# Altium PCB DAC_Board.PcbDoc
Units mm, origin at the board's own origin, x right, y up, seen from the top; angles counter-clockwise.
Board outline 60 x 60 mm, 2 copper layers (Top Layer, Bottom Layer); 69 components, 59 nets, 199 pads, 95 vias.
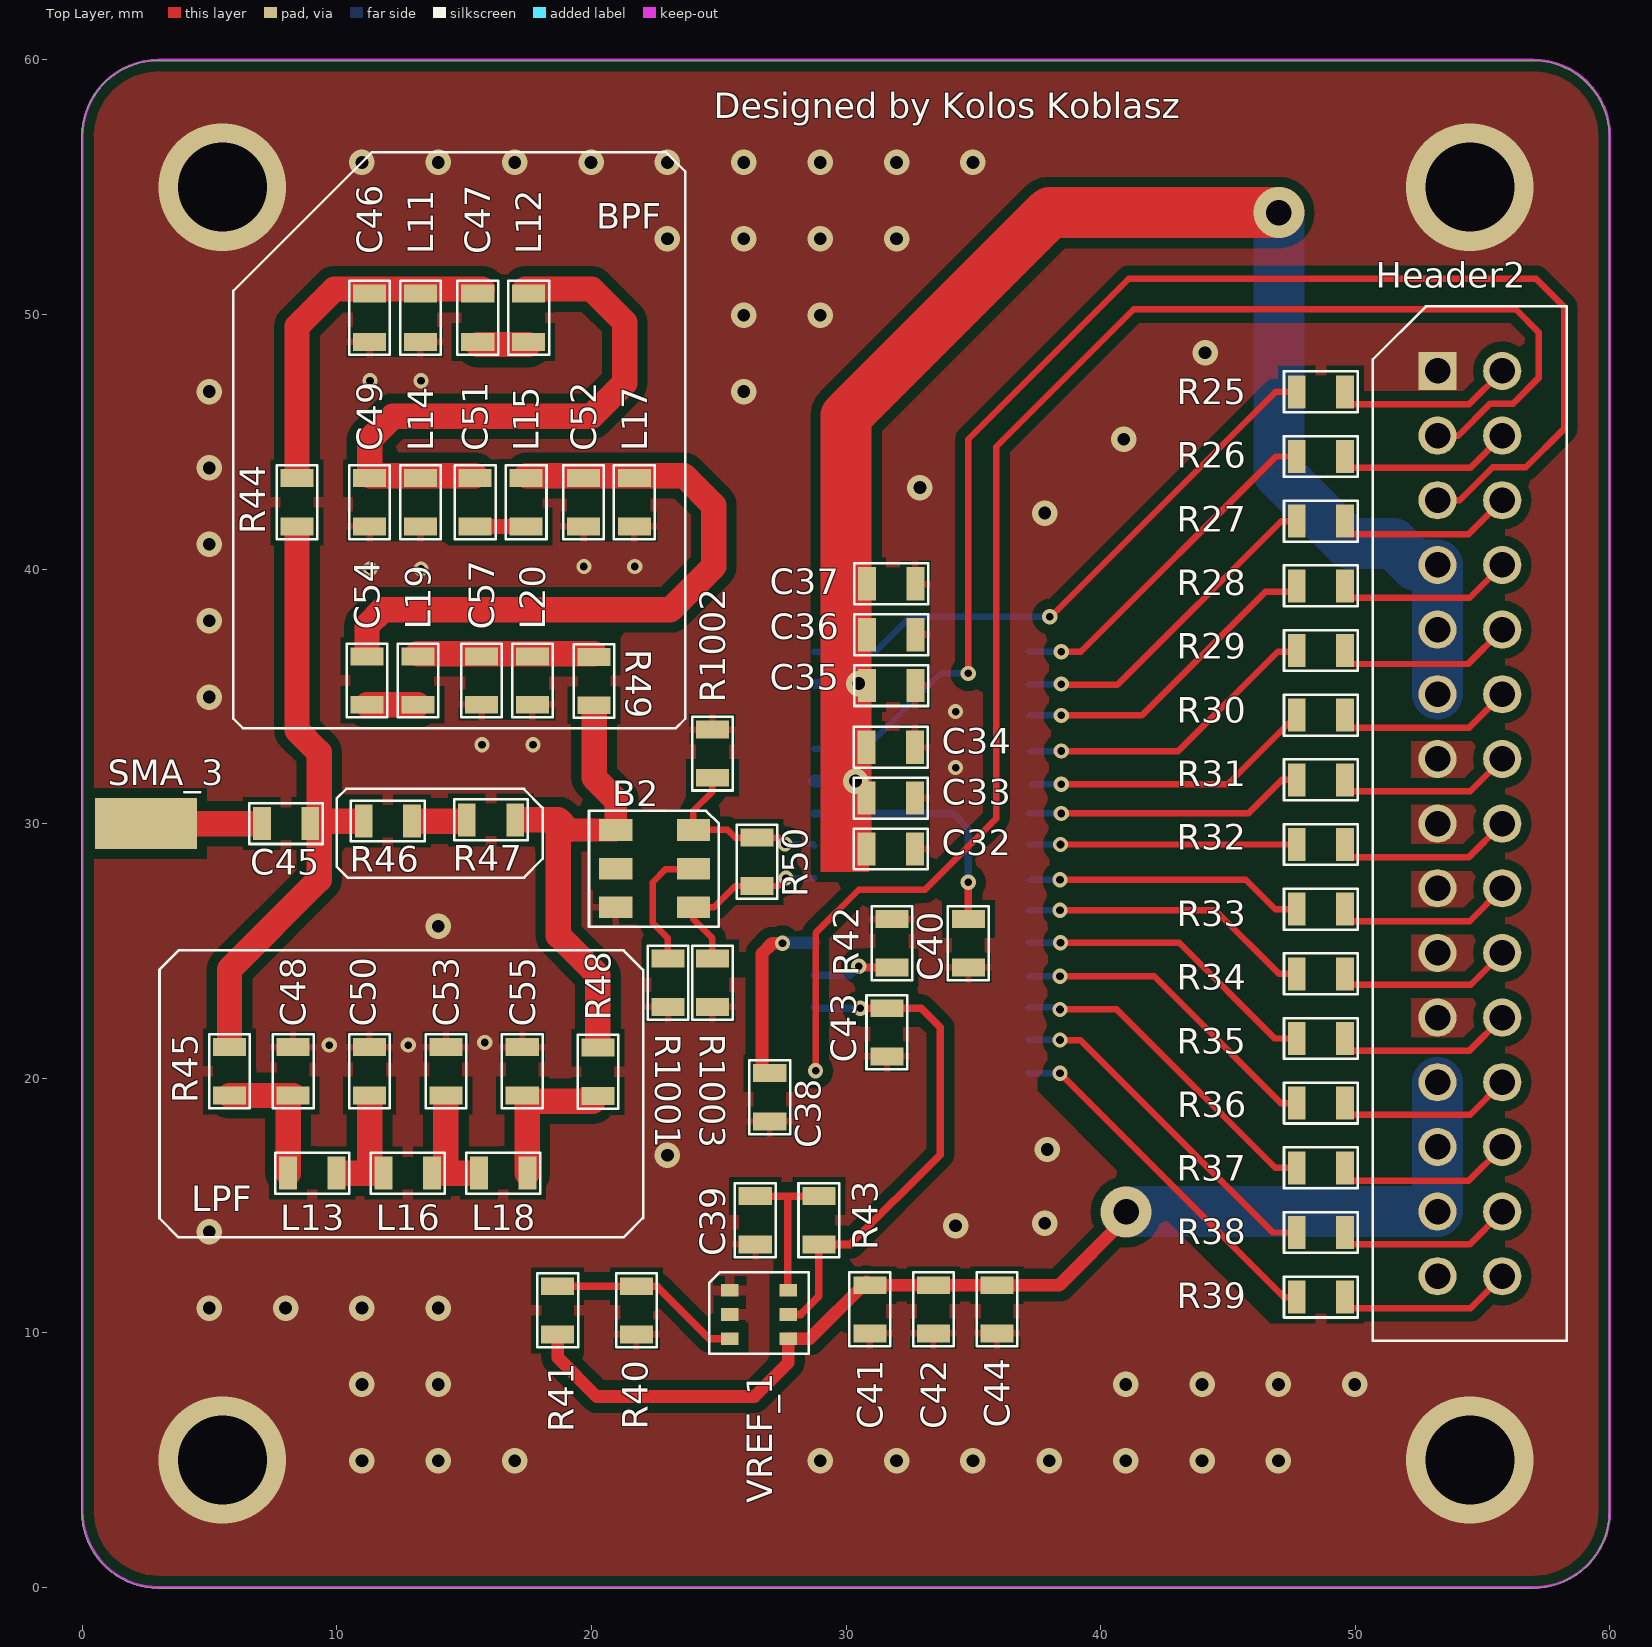
[diagram p0: Top Layer view]
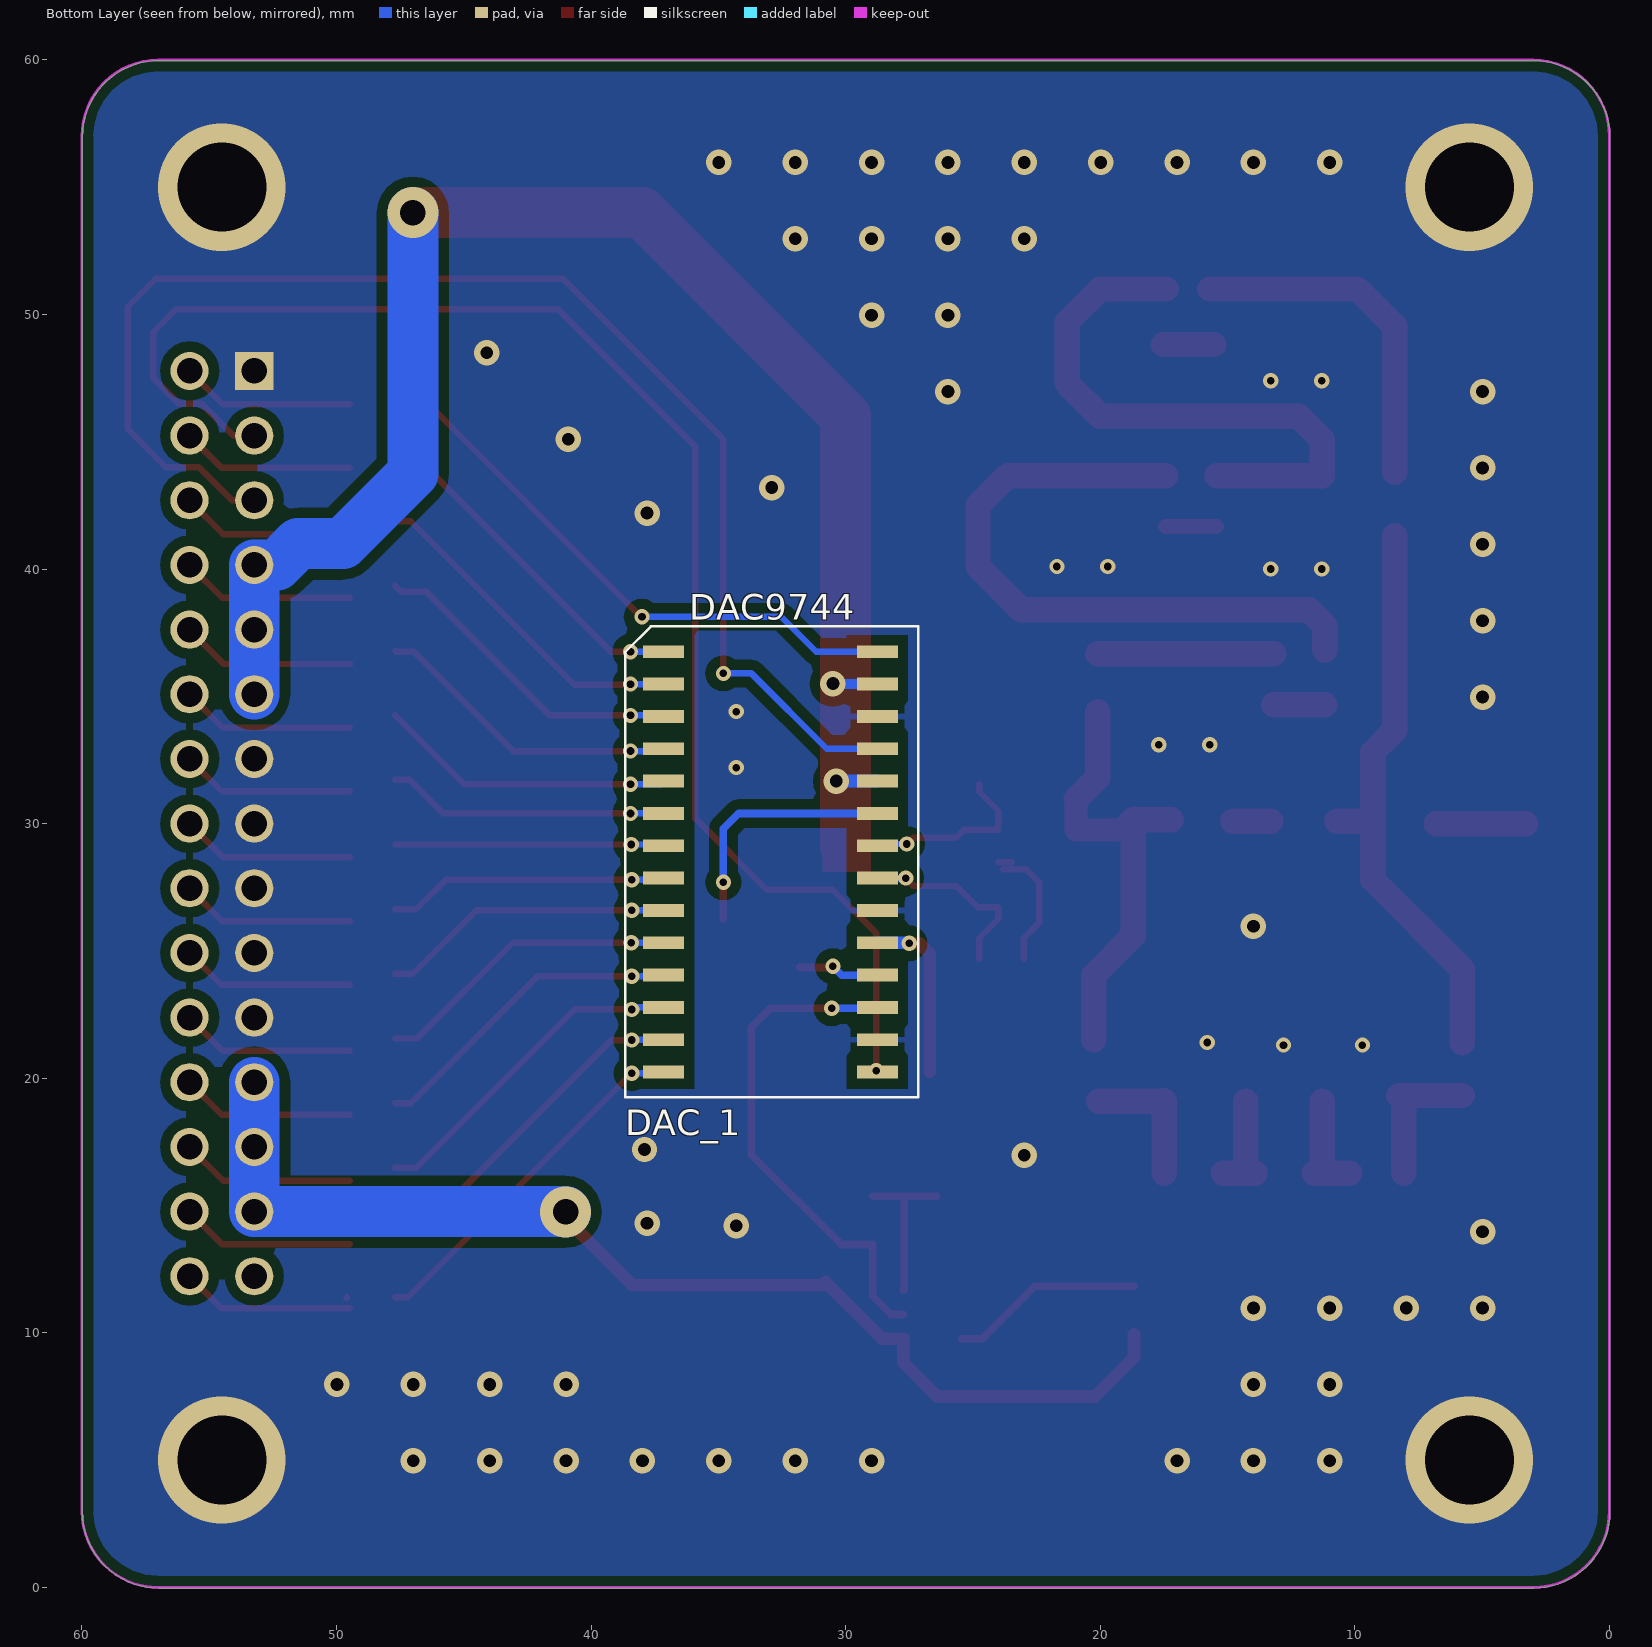
[diagram p1: Bottom Layer view, seen from below]

## Layer stack, top to bottom
Top Solder: solder mask 0.0102, Solder Resist, Dk 3.5
Top Layer: signal copper 0.0356
Dielectric 1: dielectric 0.32, FR-4, Dk 4.8
Bottom Layer: signal copper 0.0356
Bottom Solder: solder mask 0.0102, Solder Resist, Dk 3.5

## Board outline
2.98,-0.03 cw(c2.98,2.97) -0.02,2.97 -0.02,56.97 cw(c2.98,56.97) 2.98,59.97 56.98,59.97 cw(c56.98,56.97) 59.98,56.97 59.98,2.97 cw(c56.98,2.97) 56.98,-0.03

## Design rules (kind name [scope] priority, off if disabled: settings)
Clearance "Stitching GND" [IsStitchingVia and InNet('GND') vs (IsVia and (Not IsStitchingVia)) Or IsPad  Or IsTrack] p1: gap=2
Clearance Clearance_1 [All vs OnLayer('Keep-Out Layer')] p2: gap=0.4
Clearance [All] p3: gap=0.18 except(0.4: Track-Poly SMDPad-Poly THPad-Poly Via-Poly Fill-Poly)
HoleSize [All] p1: absolutevalues=TRUE maxlimit=6.7 minlimit=0.3 maxpercent=80.000 minpercent=20.000
Length [All] p1: maxlimit=2540 minlimit=0
MatchedLengths MatchedLengths_ADC [InNetClass('ADC_DataBus')] p1: tolerance=1 checknetsindiffpair=TRUE checkdiffpairvsdiffpair=FALSE checkxsignals=FALSE checkothers=FALSE
MatchedLengths MatchedLengths_DAC [InNetClass('DAC_DataBus')] p2: tolerance=1 checknetsindiffpair=TRUE checkdiffpairvsdiffpair=FALSE checkxsignals=FALSE checkothers=FALSE
MinimumAnnularRing [All] p1: minimumring=0.076
MinimumSolderMaskSliver [All] p1: minsoldermaskwidth=0
ParallelSegment [All] p1: limit=254 gap=0.254
PolygonConnect PolygonConnect_4 [HasFootprint('Balun_Coil_Craft_WBC')] p1: connectstyle=Relief reliefconductorwidth=0.254 reliefentries=4 polygonreliefangle="90 Angle" airgapwidth=0.254
PolygonConnect PolygonConnect_2 [HasFootprint('AD9744')] p2: connectstyle=Relief reliefconductorwidth=0.254 reliefentries=4 polygonreliefangle="90 Angle" airgapwidth=0.254
PolygonConnect [HasFootprint('0805 SMD Passive')] p3: connectstyle=Relief reliefconductorwidth=0.254 reliefentries=4 polygonreliefangle="90 Angle" airgapwidth=0.254
PolygonConnect PolygonConnect_1 [HasFootprint('ADR3412')] p4: connectstyle=Relief reliefconductorwidth=0.4 reliefentries=4 polygonreliefangle="90 Angle" airgapwidth=0.3
PolygonConnect PolygonConnect_3 [All] p5: connectstyle=Direct reliefconductorwidth=0.254 reliefentries=4 polygonreliefangle="90 Angle" airgapwidth=0.254
RoutingTopology [All] p1: topology=Starburst
RoutingVias [All] p1: holewidth=0.5 width=1 viastyle="Through Hole" minholewidth=0.3 minwidth=0.45 maxholewidth=1 maxwidth=6
SilkToSilkClearance [All] p1: silktosilkclearance=0
SilkToSolderMaskClearance [IsPad] p1: minsilkscreentomaskgap=0 clearancetoexposedcopper=TRUE
SolderMaskExpansion [All] p1: expansion=0.102
Width [All] p1: maxlimit=5 minlimit=0.127 preferedwidth=0.254
25 further rules are at their usual default settings.

## Classes and differential pairs
net class DAC_DataBus: DAC_CLOCK DAC_DB0 DAC_DB1 DAC_DB2 DAC_DB3 DAC_DB4 DAC_DB5 DAC_DB6 DAC_DB7 DAC_DB8 DAC_DB9 DAC_DB10 DAC_DB11 DAC_DB12 DAC_DB13
component class DAC_Filter: B2 C45 C46 C47 C48 C49 C50 C51 C52 C53 C54 C55 C57 L11 L12 L13 L14 L15 L16 L17 L18 L19 L20 R44 R45 R46 R47 R48 R49 R50 R1001 R1002 R1003 SMA_3
component class DAC_board: C32 C33 C34 C35 C36 C37 C38 C39 C40 C41 C42 C43 C44 DAC_1 Header2 R25 R26 R27 R28 R29 R30 R31 R32 R33 R34 R35 R36 R37 R38 R39 R40 R41 R42 R43 VREF_1

## Components (designator, comment, footprint, x,y, rotation, side; value= is the part's Value field where it differs from the comment)
B2 "Balun" Balun_Coil_Craft_WBC 24,29.75 r270 top locked
C32 "Cap1" "0805 SMD Passive" 31.75,29 r0 top
C33 "Cap1" "0805 SMD Passive" 31.75,31 r0 top
C34 "Cap1" "0805 SMD Passive" 31.75,33 r0 top
C35 "Cap1" "0805 SMD Passive" 31.77,35.42 r0 top
C36 "Cap1" "0805 SMD Passive" 31.77,37.42 r0 top
C37 "Cap1" "0805 SMD Passive" 31.77,39.42 r0 top
C38 "Cap1" "0805 SMD Passive" 27,19.25 r270 top
C39 "Cap1" "0805 SMD Passive" 26.43,14.42 r270 top
C40 "Cap1" "0805 SMD Passive" 34.8,25.3 r270 top
C41 "Cap1" "0805 SMD Passive" 30.93,10.92 r270 top
C42 "Cap1" "0805 SMD Passive" 33.43,10.92 r270 top
C43 "Cap1" "0805 SMD Passive" 31.6,21.8 r270 top
C44 "Cap1" "0805 SMD Passive" 35.93,10.92 r270 top
C45 "Cap1" "0805 SMD Passive" 8,30 r180 top
C46 "Cap1" "0805 SMD Passive" 11.28,49.87 r270 top
C47 "Cap1" "0805 SMD Passive" 15.53,49.87 r270 top
C48 "Cap1" "0805 SMD Passive" 8.28,20.27 r270 top
C49 "Cap1" "0805 SMD Passive" 11.28,42.62 r270 top
C50 "Cap1" "0805 SMD Passive" 11.28,20.27 r270 top
C51 "Cap1" "0805 SMD Passive" 15.43,42.62 r270 top
C52 "Cap1" "0805 SMD Passive" 19.68,42.62 r270 top
C53 "Cap1" "0805 SMD Passive" 14.28,20.27 r270 top
C54 "Cap1" "0805 SMD Passive" 11.18,35.62 r270 top
C55 "Cap1" "0805 SMD Passive" 17.28,20.27 r270 top
C57 "Cap1" "0805 SMD Passive" 15.68,35.62 r270 top
DAC_1 "DAC9744" AD9744 37.15,36.75 r270 bottom locked
Header2 "Header1" Header1 54.5,30 r270 top
L11 "Inductor" "0805 SMD Passive" 13.28,49.87 r90 top
L12 "Inductor" "0805 SMD Passive" 17.53,49.87 r90 top
L13 "Inductor" "0805 SMD Passive" 9.03,16.27 r180 top
L14 "Inductor" "0805 SMD Passive" 13.28,42.62 r90 top
L15 "Inductor" "0805 SMD Passive" 17.43,42.62 r90 top
L16 "Inductor" "0805 SMD Passive" 12.78,16.27 r180 top
L17 "Inductor" "0805 SMD Passive" 21.68,42.62 r90 top
L18 "Inductor" "0805 SMD Passive" 16.53,16.27 r180 top
L19 "Inductor" "0805 SMD Passive" 13.18,35.62 r90 top
L20 "Inductor" "0805 SMD Passive" 17.68,35.62 r90 top
R25 "Resistor" "0805 SMD Passive" 48.65,46.96 r180 top
R26 "Resistor" "0805 SMD Passive" 48.65,44.42 r180 top
R27 "Resistor" "0805 SMD Passive" 48.65,41.88 r180 top
R28 "Resistor" "0805 SMD Passive" 48.65,39.34 r180 top
R29 "Resistor" "0805 SMD Passive" 48.65,36.8 r180 top
R30 "Resistor" "0805 SMD Passive" 48.65,34.26 r180 top
R31 "Resistor" "0805 SMD Passive" 48.65,31.72 r180 top
R32 "Resistor" "0805 SMD Passive" 48.65,29.18 r180 top
R33 "Resistor" "0805 SMD Passive" 48.65,26.64 r180 top
R34 "Resistor" "0805 SMD Passive" 48.65,24.1 r180 top
R35 "Resistor" "0805 SMD Passive" 48.65,21.56 r180 top
R36 "Resistor" "0805 SMD Passive" 48.65,19.02 r180 top
R37 "Resistor" "0805 SMD Passive" 48.65,16.48 r180 top
R38 "Resistor" "0805 SMD Passive" 48.65,13.94 r180 top
R39 "Resistor" "0805 SMD Passive" 48.65,11.4 r180 top
R40 "Resistor" "0805 SMD Passive" 21.77,10.88 r270 top
R41 "Resistor" "0805 SMD Passive" 18.67,10.88 r270 top
R42 "Resistor" "0805 SMD Passive" 31.8,25.3 r90 top
R43 "Resistor" "0805 SMD Passive" 28.93,14.42 r270 top
R44 "Resistor" "0805 SMD Passive" 8.43,42.62 r270 top
R45 "Resistor" "0805 SMD Passive" 5.78,20.27 r90 top
R46 "Resistor" "0805 SMD Passive" 12,30.1 r0 top
R47 "Resistor" "0805 SMD Passive" 16.05,30.15 r180 top
R48 "Resistor" "0805 SMD Passive" 20.25,20.25 r270 top
R49 "Resistor" "0805 SMD Passive" 20.1,35.6 r90 top
R50 "Resistor" "0805 SMD Passive" 26.5,28.5 r90 top
R1001 "Resistor" "0805 SMD Passive" 23,23.75 r270 top
R1002 "Resistor" "0805 SMD Passive" 24.75,32.75 r90 top
R1003 "Resistor" "0805 SMD Passive" 24.75,23.75 r270 top
SMA_3 "SMA1" "SMA Flange" 2.5,30 r90 top
VREF_1 "ADR3412" ADR3412 25.43,11.67 r270 top

## Footprints (in the part's own frame and the unit in brackets; to place one, negate y for a bottom-side part, rotate by r counter-clockwise, add the part's x,y. Pads: shape width x height; smd on the part's side, far side on the other; paste and mask are expansions set on the pad)
"0805 SMD Passive" [mm] "General 0805 SMD componenet footprint"
  rect 0.7x1.3 smd: 1(-0.95,0) 2(0.95,0)
  Top Layer pour cut-out: -0.6,0.65 0.6,0.65 0.6,-0.65 -0.6,-0.65
  silkscreen extent -1.45,-0.8 1.45,0.8, body extent -1.15,-0.6 1.15,0.6, height 0.45
AD9744 [mm] "SOIC-28"
  rect 0.5x1.6 smd: 1(0,0) 2(1.27,0) 3(2.54,0) 4(3.81,0) 5(5.08,0) 6(6.35,0) 7(7.62,0) 8(8.89,0) 9(10.16,0) 10(11.43,0) 11(12.7,0) 12(13.97,0) 13(15.24,0) 14(16.51,0) 15(16.51,8.4) 16(15.24,8.4) 17(13.97,8.4) 18(12.7,8.4) 19(11.43,8.4) 20(10.16,8.4) 21(8.89,8.4) 22(7.62,8.4) 23(6.35,8.4) 24(5.08,8.4) 25(3.81,8.4) 26(2.54,8.4) 27(1.27,8.4) 28(0,8.4)
  silkscreen extent -1,-1.5 17.5,10, body extent -0.5,0 17,8.5, height 1.45
ADR3412 [mm]
  rect 0.5x0.7 smd: 1(0,0) 2(0.95,0) 3(1.9,0) 4(1.9,2.3) 5(0.95,2.3) 6(0,2.3)
  silkscreen extent -0.7,-0.8 2.5,3.1, body extent -0.2,0.1 2.1,2.2, height 1.45
Balun_Coil_Craft_WBC [mm] "SMD Transformer"
  rect 0.85x1.3 smd: 1(0,0) 2(1.52,0) 3(3.04,0) 4(3.04,-3.05) 5(1.52,-3.05) 6(0,-3.05)
  Top Layer pour cut-out: -0.8,-0.8 3.8,-0.8 3.8,-2.2 -0.8,-2.2
  silkscreen extent -0.75,-4.1 3.8,1, body extent -0.25,-3.75 3.04,0.25, height 3
Header1 [mm] "30-Pin DIL"
  rect 1.5x1.5 hole 1: 1(-17.78,-1.27)
  round 1.5 hole 1: 2(-17.78,1.27) 3(-15.24,-1.27) 4(-15.24,1.27) 5(-12.7,-1.27) 6(-12.7,1.27) 7(-10.16,-1.27) 8(-10.16,1.27) 9(-7.62,-1.27) 10(-7.62,1.27) 11(-5.08,-1.27) 12(-5.08,1.27) 13(-2.54,-1.27) 14(-2.54,1.27) 15(0,-1.27) 16(0,1.27) 17(2.54,-1.27) 18(2.54,1.27) 19(5.08,-1.27) 20(5.08,1.27) 21(7.62,-1.27) 22(7.62,1.27) 23(10.16,-1.27) 24(10.16,1.27) 25(12.7,-1.27) 26(12.7,1.27) 27(15.24,-1.27) 28(15.24,1.27) 29(17.78,-1.27) 30(17.78,1.27)
  silkscreen extent -20.32,-3.81 20.32,3.81, body extent -19.28,-3.27 19.72,3.23, height 2
"SMA Flange" [mm] "Flange Connector"
  rect 2x4 smd: 1(0,0)

## Part data
B2: library part Balun3, "SMD Balun"
C32 C33 C34 C35 C36 C37 C38 C39 C40 C41 C42 C43 C44 C45 C46 C47 C48 C49 C50 C51 C52 C53 C54 C55 C57: "SMD Capacitor"
DAC_1: library part AD9744, "Digital Analog Converter"
Header2: "29 Pin Header"
L11 L12 L13 L14 L15 L16 L17 L18 L19 L20: library part Ind1, "SMD Inductor"
R25 R26 R27 R28 R29 R30 R31 R32 R33 R34 R35 R36 R37 R38 R39 R40 R41 R42 R43 R44 R45 R46 R47 R48 R49 R50 R1001 R1002 R1003: library part Res1, "SMD Resistor"
SMA_3: "SMA Female"
VREF_1: "1.2 Voltage Ref Source"

## Via types
v1: diameter 1, hole 0.5, Top Layer to Bottom Layer, tented top, 51 vias
v2: diameter 0.6, hole 0.3, Top Layer to Bottom Layer, 36 vias
v3: diameter 5, hole 3.5, Top Layer to Bottom Layer, tented both sides, 4 vias
v4: diameter 2, hole 1, Top Layer to Bottom Layer, 2 vias
v5: diameter 1, hole 0.5, Top Layer to Bottom Layer, 2 vias

## Nets (pads, with @x,y where several pads share a name; then routed paths per layer and width w, separated by ;. In a path a pad name is that pad's centre, name@x,y a point inside that pad or via, vN(x,y) a via of type N, cw(c..) or ccw(c..) an arc to the next point about the centre after c; other vN are vias at no path point)
DAC_CLOCK: DAC_1.28 R25.2 | length 23.2
  Top Layer w0.254: v2(38,38.125) 38.035,38.125 46.87,46.96 R25.2
  Bottom Layer w0.254: DAC_1.28 31.15,36.75 32.525,38.125 v2(38,38.125)
DAC_DB0: DAC_1.14 R39.2 | length 14.2
  Top Layer w0.254: v2(38.4,20.2) 47.2,11.4 R39.2
  Bottom Layer w0.254: DAC_1.14 37.19,20.2 v2(38.4,20.2)
DAC_DB1: DAC_1.13 R38.2 | length 13.7
  Top Layer w0.254: v2(38.4,21.5) 39.2,21.5 46.76,13.94 R38.2
  Bottom Layer w0.254: DAC_1.13 38.39,21.51 v2(38.4,21.5)
DAC_DB2: DAC_1.12 R37.2 | length 13.2
  Top Layer w0.254: v2(38.4,22.7) 40.634,22.7 46.854,16.48 R37.2
  Bottom Layer w0.254: DAC_1.12 38.32,22.78 v2(38.4,22.7)
DAC_DB3: DAC_1.11 R36.2 | length 12.6
  Top Layer w0.254: v2(38.4,24) 42.1,24 47.08,19.02 R36.2
  Bottom Layer w0.254: DAC_1.11@37.2,24 v2(38.4,24)
DAC_DB4: DAC_1.10 R35.2 | length 12.1
  Top Layer w0.254: v2(38.42,25.32) 43.08,25.32 46.84,21.56 R35.2
  Bottom Layer w0.254: DAC_1.10 v2(38.42,25.32)
DAC_DB5: DAC_1.9 R34.2 | length 11.6
  Top Layer w0.254: v2(38.4,26.6) 44.5,26.6 47,24.1 R34.2
  Bottom Layer w0.254: DAC_1.9@37.16,26.6 v2(38.4,26.6)
DAC_DB6: DAC_1.8 R33.2 | length 11
  Top Layer w0.254: v2(38.4,27.8) 45.7,27.8 46.86,26.64 R33.2
  Bottom Layer w0.254: DAC_1.8@37.21,27.8 v2(38.4,27.8)
DAC_DB7: DAC_1.7 R32.2 | length 10.5
  Top Layer w0.254: v2(38.42,29.18) R32.2
  Bottom Layer w0.254: DAC_1.7@37.2,29.18 v2(38.42,29.18)
DAC_DB8: DAC_1.6 R31.2 | length 11.1
  Top Layer w0.254: v2@38.4,30.4 v2(38.45,30.4) 45.8,30.4 47.12,31.72 R31.2
  Bottom Layer w0.254: DAC_1.6 v2@38.4,30.4
DAC_DB9: DAC_1.5 R30.2 | length 11.6
  Top Layer w0.254: v2(38.45,31.55) 44.99,31.55 R30.2
  Bottom Layer w0.254: DAC_1.5@37.27,31.55 v2(38.45,31.55)
DAC_DB10: DAC_1.4 R29.2 | length 12.1
  Top Layer w0.254: v2(38.45,32.85) 43.05,32.85 46.95,36.75 47.65,36.75 R29.2
  Bottom Layer w0.254: DAC_1.4@37.24,32.85 v2(38.45,32.85)
DAC_DB11: DAC_1.3 R28.2 | length 12.6
  Top Layer w0.254: v2(38.45,34.25) 41.615,34.25 46.479,39.114 47.474,39.114 R28.2
  Bottom Layer w0.254: DAC_1.3@37.19,34.25 v2(38.45,34.25)
DAC_DB12: DAC_1.2 R27.2 | length 13.2
  Top Layer w0.254: v2(38.45,35.48) 38.48,35.45 40.656,35.45 47.086,41.88 R27.2
  Bottom Layer w0.254: DAC_1.2 v2(38.45,35.48)
DAC_DB13: DAC_1.1 R26.2 | length 13.7
  Top Layer w0.254: v2(38.45,36.75) 39.218,36.75 46.888,44.42 R26.2
  Bottom Layer w0.254: DAC_1.1 v2(38.45,36.75)
DAC_IOUT_A: B2.1 DAC_1.22 R50.2 R1002.1 | length 7.1
  Top Layer w0.254: R1002.1@24.75,31.55 24.75,31.25 24,30.5 B2.1 25.35,29.75 25.65,29.45 R50.2 27.35,29.45 v2(27.6,29.2)
  Bottom Layer w0.254: v2(27.6,29.2) 28.68,29.2 DAC_1.22
DAC_IOUT_B: B2.3 DAC_1.21 R50.1 R1003.1 | length 7.5
  Top Layer w0.254: R1003.1 24.75,25.5 24,26.25 B2.3 24.81,26.71 25.65,27.55 R50.1 27.33,27.55 v2(27.64,27.86)
  Bottom Layer w0.254: v2(27.64,27.86) DAC_1.21
DAC_MODE: DAC_1.25 Header2.5 | length 53.9
  Top Layer w0.254: v2(34.8,35.9) 34.8,45.1 41.1,51.4 57.1,51.4 58.2,50.3 58.2,45.5 56.7,44 55.4,44 54.1,42.7 Header2.5
  Bottom Layer w0.254: DAC_1.25 30.74,32.94 33.7,35.9 v2(34.8,35.9)
DAC_NC: C38.1 DAC_1.19 | length 6.9
  Top Layer w0.5: C38.1@26.7,20.25 26.7,24.9 27.1,25.3 v2(27.5,25.3)
  Bottom Layer w0.5: v2(27.5,25.3) 27.52,25.32 DAC_1.19
DAC_REFIO: C43.1 DAC_1.17 R43.2 VREF_1.5 | length 20
  Top Layer w0.3: VREF_1.5 28.22,10.72 28.93,11.43 R43.2 30.17,13.47 33.7,17 33.7,22 32.95,22.75 C43.1 v2(30.55,22.75)
  Bottom Layer w0.3: DAC_1.17 28.78,22.75 v2(30.55,22.75)
DAC_RESERVED: C40.1 DAC_1.23 | length 9.8
  Top Layer w0.3: C40.1 v2(34.8,27.7)
  Bottom Layer w0.3: DAC_1.23 34.2,30.4 34.8,29.8 v2(34.8,27.7)
DAC_SLEEP: DAC_1.15 Header2.3 | length 59.6
  Top Layer w0.254: v2(28.8,20.29) 28.8,25.7 30.5,27.4 33.1,27.4 35.9,30.2 35.9,44.8 41.3,50.2 56.3,50.2 57.2,49.3 57.2,47.5 56.2,46.5 55.3,46.5 54.04,45.24 Header2.3
DAC_VDD_FILT: C32.1 C33.1 C34.1 C35.1 C36.1 C37.1 DAC_1.24 DAC_1.27 Header2.7 Header2.9 Header2.11 | length 63.6
  Top Layer w2: 30,29.1 30,33 30,37.42 30,46 38,54 v4(47,54)
  Bottom Layer w0.4: DAC_1.27 v5@30.48,35.48
  Bottom Layer w0.5: DAC_1.24 v5(30.37,31.67)
  Bottom Layer w2: v4(47,54) 47,43.75 49.75,41 51.5,41 52.34,40.16 Header2.7 Header2.9 Header2.11
  other v5: 30.5,35.5
FILTER_INPUT: B2.6 R47.1 R48.1 R49.1 | length 18.2
  Top Layer w0.9: 19.1,29.75 B2.6 20.95,30.95
  Top Layer w1: R47.1@17.2,30.15 18.7,30.15 ; 19.1,29.75 18.7,30.15 ; R49.1@20.1,34.4 20.1,31.8 20.95,30.95 ; R48.1@20.25,21.5 20.25,24.05 18.7,25.6 18.7,30.15
FILTER_OUTPUT: C45.1 R44.2 R45.2 R46.1 | length 23
  Top Layer w1: R45.2@5.78,21.4 5.78,24.28 9.3,27.8 9.3,32.8 8.43,33.67 8.43,41.3 ; 9.4,30.1 10.7,30.1
GND: B2.4 C32.2 C33.2 C34.2 C35.2 C36.2 C37.2 C38.2 C39.2 C40.2 C41.2 C42.2 C43.2 C44.2 C46.2 C48.1 C49.2 C50.1 C52.2 C53.1 C55.1 C57.2 DAC_1.16 DAC_1.20 DAC_1.26 Header2.1 Header2.13 Header2.15 Header2.17 Header2.19 Header2.21 L11.1 L14.1 L17.1 L20.1 R40.2 R42.2 R1001.2 R1002.2 R1003.2 VREF_1.1 VREF_1.2
  other v1: 10.98,4.97 13.98,4.97 16.98,4.97 28.98,4.97 31.98,4.97 34.98,4.97 37.98,4.97 40.98,4.97 43.98,4.97 46.98,4.97 10.98,7.97 13.98,7.97 40.98,7.97 43.98,7.97 46.98,7.97 49.98,7.97 4.98,10.97 7.98,10.97 10.98,10.97 13.98,10.97 4.98,13.97 34.3,14.2 37.8,14.3 22.98,16.97 37.9,17.2 13.98,25.97 4.98,34.97 4.98,37.97 4.98,40.97 37.8,42.2 32.9,43.2 4.98,43.97 40.9,45.1 4.98,46.97 25.98,46.97 44.1,48.5 25.98,49.97 28.98,49.97 22.98,52.97 25.98,52.97 28.98,52.97 31.98,52.97 10.98,55.97 13.98,55.97 16.98,55.97 19.98,55.97 22.98,55.97 25.98,55.97 28.98,55.97 31.98,55.97 34.98,55.97
  other v2: 9.7,21.3 12.8,21.3 15.8,21.4 34.3,32.2 15.7,33.1 17.7,33.1 34.3,34.4 11.3,40 13.3,40 19.7,40.1 21.7,40.1 11.3,47.4 13.3,47.4
  other v3: 5.5,5 54.5,5 5.5,55 54.5,55
H_DAC_CLOCK: Header2.2 R25.1 | length 6.8
  Top Layer w0.254: R25.1@49.48,46.47 54.47,46.47 Header2.2@55.75,47.75
H_DAC_DB0: Header2.30 R39.1 | length 6.8
  Top Layer w0.254: R39.1@49.48,10.97 54.53,10.97 Header2.30@55.75,12.19 ; R39.1@49.6,11.35 R39.1
H_DAC_DB1: Header2.28 R38.1 | length 6.8
  Top Layer w0.254: R38.1@49.48,13.47 54.49,13.47 Header2.28@55.75,14.73
H_DAC_DB2: Header2.26 R37.1 | length 6.8
  Top Layer w0.254: R37.1@49.48,15.97 54.45,15.97 Header2.26@55.75,17.27
H_DAC_DB3: Header2.24 R36.1 | length 6.8
  Top Layer w0.254: R36.1@49.48,18.57 54.51,18.57 Header2.24@55.75,19.81
H_DAC_DB4: Header2.22 R35.1 | length 6.8
  Top Layer w0.254: R35.1@49.48,21.07 54.47,21.07 Header2.22@55.75,22.35
H_DAC_DB5: Header2.20 R34.1 | length 6.8
  Top Layer w0.254: R34.1@49.48,23.67 54.53,23.67 Header2.20@55.75,24.89
H_DAC_DB6: Header2.18 R33.1 | length 6.8
  Top Layer w0.254: R33.1@49.48,26.17 54.49,26.17 Header2.18@55.75,27.43
H_DAC_DB7: Header2.16 R32.1 | length 6.8
  Top Layer w0.254: R32.1@49.48,28.67 54.45,28.67 Header2.16@55.75,29.97
H_DAC_DB8: Header2.14 R31.1 | length 6.8
  Top Layer w0.254: R31.1@49.48,31.27 54.51,31.27 Header2.14@55.75,32.51
H_DAC_DB9: Header2.12 R30.1 | length 6.8
  Top Layer w0.254: R30.1@49.48,33.77 54.47,33.77 Header2.12@55.75,35.05
H_DAC_DB10: Header2.10 R29.1 | length 6.8
  Top Layer w0.254: R29.1@49.48,36.27 54.43,36.27 Header2.10@55.75,37.59
H_DAC_DB11: Header2.8 R28.1 | length 6.8
  Top Layer w0.254: R28.1@49.48,38.87 54.49,38.87 Header2.8@55.75,40.13
H_DAC_DB12: Header2.6 R27.1 | length 6.8
  Top Layer w0.254: R27.1@49.48,41.37 54.45,41.37 Header2.6@55.75,42.67
H_DAC_DB13: Header2.4 R26.1 | length 6.8
  Top Layer w0.254: R26.1@49.48,43.97 54.51,43.97 Header2.4@55.75,45.21
NetB2_2: B2.2 R1001.1 | length 5.4
  Top Layer w0.254: R1001.1 23,25.5 22.4,26.1 22.4,27.7 22.9,28.2 B2.2@23.8,28.2 ; B2.2@23.48,28.48 B2.2@24,28.48
NetC39_1: C39.1 R43.1 VREF_1.6 | length 6.1
  Top Layer w0.3: C39.1 R43.1 ; 27.7,15.3 27.7,11.7 VREF_1.6
NetC45_2: C45.2 SMA_3.1 | length 3.5
  Top Layer w1: SMA_3.1@3.275,30 C45.2@6.8,30
NetC46_1: C46.1 C47.1 L11.2 R44.1 | length 13.6
  Top Layer w1: R44.1@8.43,43.8 8.43,49.53 9.9,51 C47.1@15.7,51
NetC47_2: C47.2 L12.1 | length 2
  Top Layer w1: C47.2@15.53,48.82 L12.1@17.53,48.82
NetC48_2: C48.2 L13.2 R45.1 | length 5.6
  Top Layer w1: R45.1 C48.2 8.08,19.12 L13.2
NetC49_1: C49.1 C51.1 L12.2 L14.2 | length 23.3
  Top Layer w1: C51.1@15.43,43.67 11.28,43.67 11.28,45.08 12.2,46 20,46 21.3,47.3 21.3,49.7 20,51 L12.2@17.4,51
NetC50_2: C50.2 L13.1 L16.2 | length 3.9
  Top Layer w1: L13.1@10.2,16.27 L16.2@11.6,16.27 ; 11.28,16.59 C50.2@11.28,19.1
NetC51_2: C51.2 L15.1 | length 2
  Top Layer w0.6: C51.2 L15.1
NetC52_1: C52.1 C54.1 L15.2 L17.2 | length 25.8
  Top Layer w1: C54.1@11.18,36.8 11.18,37.78 11.8,38.4 23.1,38.4 24.8,40.1 24.8,42.5 23.63,43.67 L15.2@17.43,43.67
NetC53_2: C53.2 L16.1 L18.2 | length 3.7
  Top Layer w1: L16.1@13.9,16.27 15.17,16.27 ; 14.28,16.65 C53.2@14.28,19.1
NetC54_2: C54.2 L19.1 | length 2
  Top Layer w1: C54.2 L19.1
NetC55_2: C55.2 L18.1 R48.2 | length 5.4
  Top Layer w1: L18.1 17.48,19.12 17.5,19.1 R48.2@20.05,19.1
NetC57_1: C57.1 L19.2 L20.2 R49.2 | length 6.9
  Top Layer w1: L19.2@13.18,36.67 R49.2@20.1,36.67
NetDAC_1_18: DAC_1.18 R42.1 | length 3.2
  Top Layer w0.3: v2(30.5,24.4) 30.55,24.35 R42.1
  Bottom Layer w0.3: DAC_1.18 30.15,24.05 v2(30.5,24.4)
NetR40_1: R40.1 R41.1 VREF_1.3 | length 7.6
  Top Layer w0.3: R41.1 R40.1 22.57,11.83 24.63,9.77 VREF_1.3
NetR46_2: R46.2 R47.2 | length 1.5
  Top Layer w1: R46.2@13.3,30.1 R47.2@14.8,30.1
REF_VDD: C41.1 C42.1 C44.1 Header2.23 Header2.25 Header2.27 R41.2 VREF_1.4 | length 45
  Top Layer w0.5: R41.2 18.67,9.03 20.2,7.5 26.4,7.5 27.73,8.83 VREF_1.4 28.57,9.77 30.8,12 C41.1 C42.1 C44.1 38.37,11.87 41,14.5 v4(41,14.75)
  Bottom Layer w2: v4(41,14.75) 41.01,14.76 Header2.27 Header2.25 Header2.23
pads on no net: B2.5 Header2.29

## Polygon pours and split planes (outlines as drawn)
GND on Top Layer "Top_GND_Pour" (solid, remove dead copper, pour order 0): -0.003,3 -0.003,57 cw(c2.997,57) 2.997,60 56.997,60 cw(c56.997,57) 59.997,57 59.997,3 cw(c56.997,3) 56.997,0 2.997,0 cw(c2.997,3)
GND on Bottom Layer "Bottom_GND_Pour" (solid, remove dead copper, pour order 2): 0,3 0,57 cw(c3,57) 3,60 57,60 cw(c57,57) 60,57 60,3 cw(c57,3) 57,0 3,0 cw(c3,3)
no net on Bottom Solder "SolderMask" (solid): 3,0 cw(c3,3) 0,3 0,57 cw(c3,57) 3,60 57,60 cw(c57,57) 60,57 60,3 cw(c57,3) 57,0

## Keep-outs
Keep-Out Layer:
  lines w0.1: 0,3 ccw(c3,3) 3,0 57,0 ccw(c57,3) 60,3 60,57 ccw(c57,57) 57,60 3,60 ccw(c3,57) 0,57 0,3

## Other copper
Top Layer:
  rectangle net DAC_VDD_FILT: 29,28.1 30.9,30.17
  rectangle net NetC45_2: 4.4,29.5 5.6,30.4
  pour cut-out: 47.071,10.35 46.65,10.35 37.5,19.5 37.5,20 37.84,20 38.338,19.502
  pour cut-out: 52.2,33.77 52.2,21.1 50.7,21.1 50.7,21.4 50.7,33.77

## Silkscreen, mask and mechanical layers (free items; w line width, h text height)
Top Overlay:
  lines w0.1: 17.33,27.87 18.08,28.62 18.08,30.62 17.33,31.37 ; 17.35,27.87 10.43,27.87 10,28.3 10,31 10.37,31.37 17.35,31.37 ; 3.03,14.5 3.78,13.75 21.25,13.75 22,14.5 22.03,14.5 22.03,24.25 21.26,25.02 21.25,25.02 3.78,25.02 3.03,24.27 3.03,24.02 3.03,14.5 ; 5.93,34.12 6.3,33.75 18.56,33.75 23.31,33.75 23.68,34.12 23.68,55.62 22.93,56.37 11.37,56.37 5.93,50.93 5.93,34.12
  text "Designed by Kolos Koblasz" at 24.8,57.7 h1
  text "BPF" at 20.18,53.37 h1
  text "LPF" at 4.28,14.77 h1
Bottom Solder:
  pour cut-out: 41,12 cw(c41,15) 38,15 cw(c41,15) 41,18 52,18 52,12
  pour cut-out: 47,38 cw(c47,41) 44,41 44,54 cw(c47,54) 47,57 cw(c47,54) 50,54 50,44 52,44 52,38
  pour cut-out: 26,21 26,38 cw(c29,38) 29,41 37,41 cw(c37,38) 40,38 40,21 cw(c37,21) 37,18 29,18 cw(c29,21)
  lines w0.1: 0,3 ccw(c3,3) 3,0 57,0 ccw(c57,3) 60,3 60,57 ccw(c57,57) 57,60 29,60 26,60 3,60 ccw(c3,57) 0,57 0,3
Mechanical 1:
  circle w0.1: c5.5,5 r1.75
  circle w0.1: c54.5,5 r1.75
  circle w0.1: c54.5,55 r1.75
  circle w0.1: c5.5,55 r1.75
  lines w0.1: 50.98,12.97 ccw(c53.98,12.97) 53.98,9.97 54.98,9.97 ccw(c54.98,12.97) 57.98,12.97 57.98,46.97 ccw(c54.98,46.97) 54.98,49.97 53.98,49.97 ccw(c53.98,46.97) 50.98,46.97 50.98,12.97
Mechanical 2:
  lines w0.1: 26,21 ccw(c29,21) 29,18 37,18 ccw(c37,21) 40,21 40,38 ccw(c37,38) 37,41 29,41 ccw(c29,38) 26,38 26,21 ; 38,15 cw(c41,15) 41,18 52,18 52,12 41,12 cw(c41,15) 38,15 ; 44,41 ccw(c47,41) 47,38 52,38 52,44 50,44 50,54 ccw(c47,54) 47,57 ccw(c47,54) 44,54 44,41